# Altium PCB Soldeerbout.PcbDoc
Units mm, origin at the board's own origin, x right, y up, seen from the top; angles counter-clockwise.
Board outline 152.4 x 104.14 mm, 2 copper layers (Top Layer, Bottom Layer); 78 components, 76 nets, 271 pads, 56 vias.
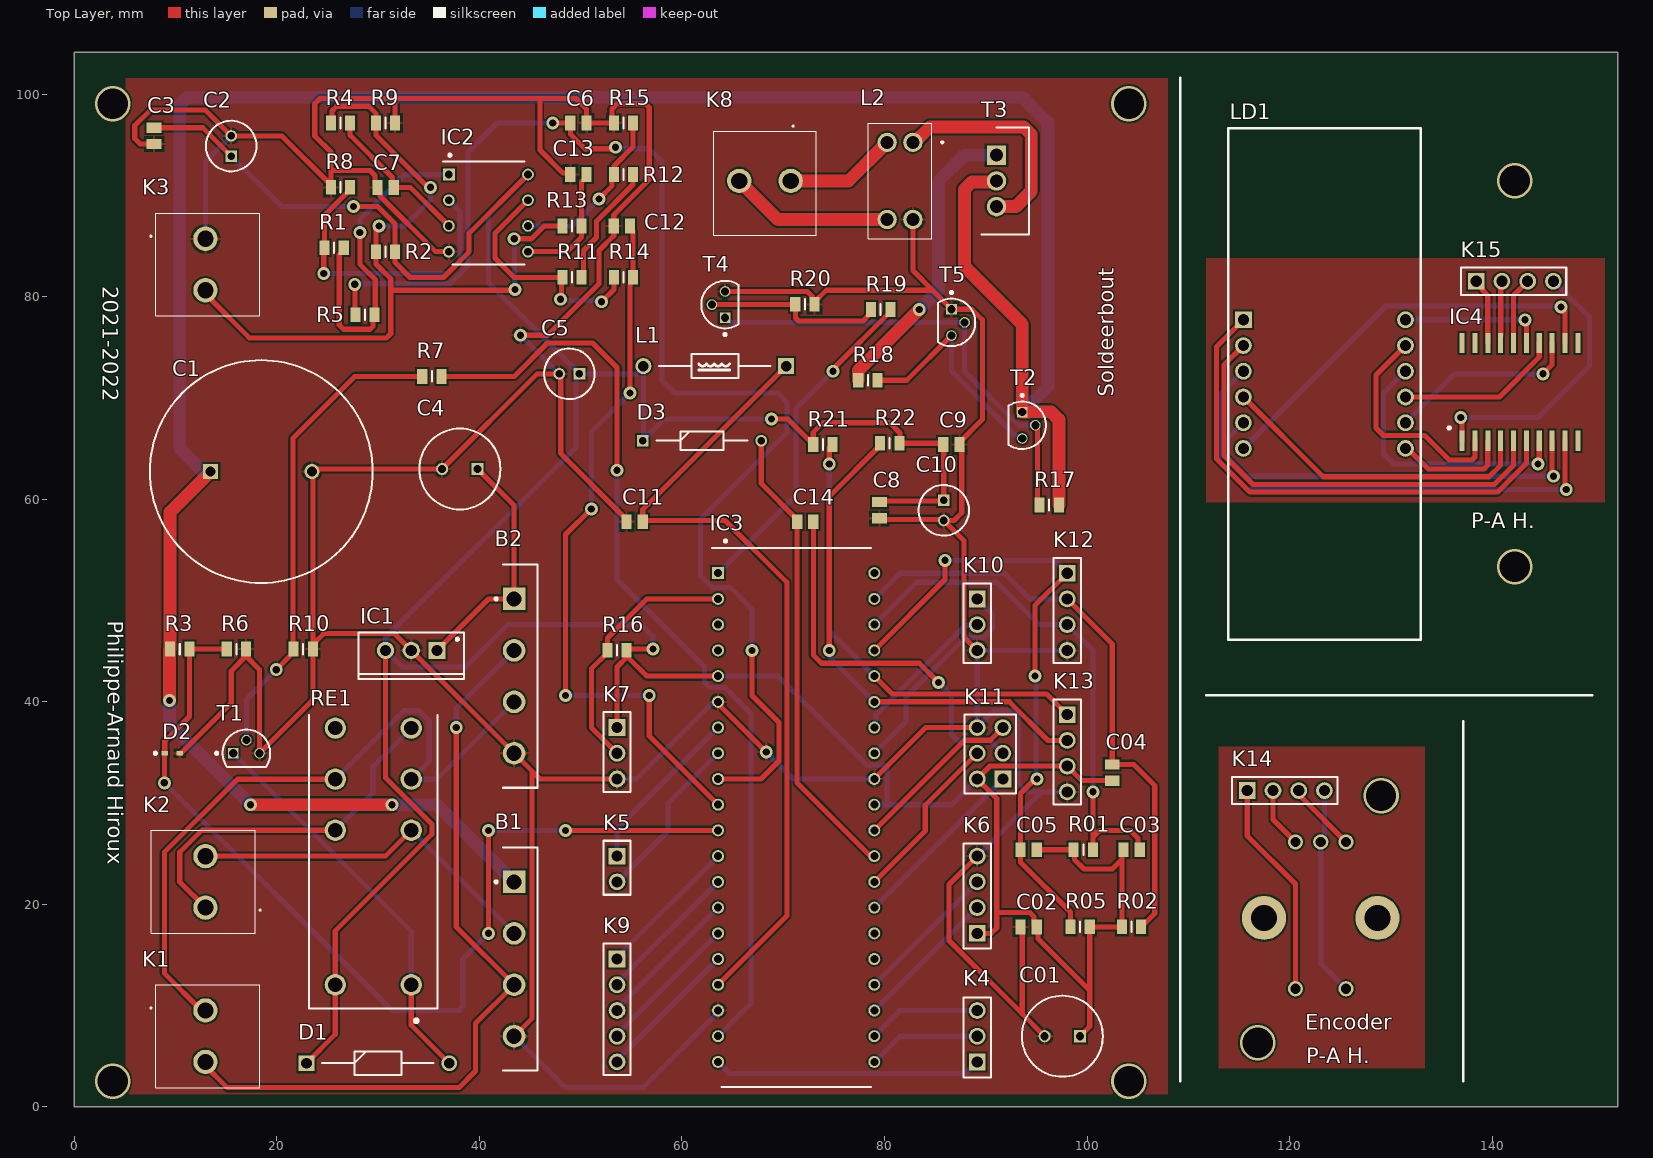
[diagram p0: Top Layer view]
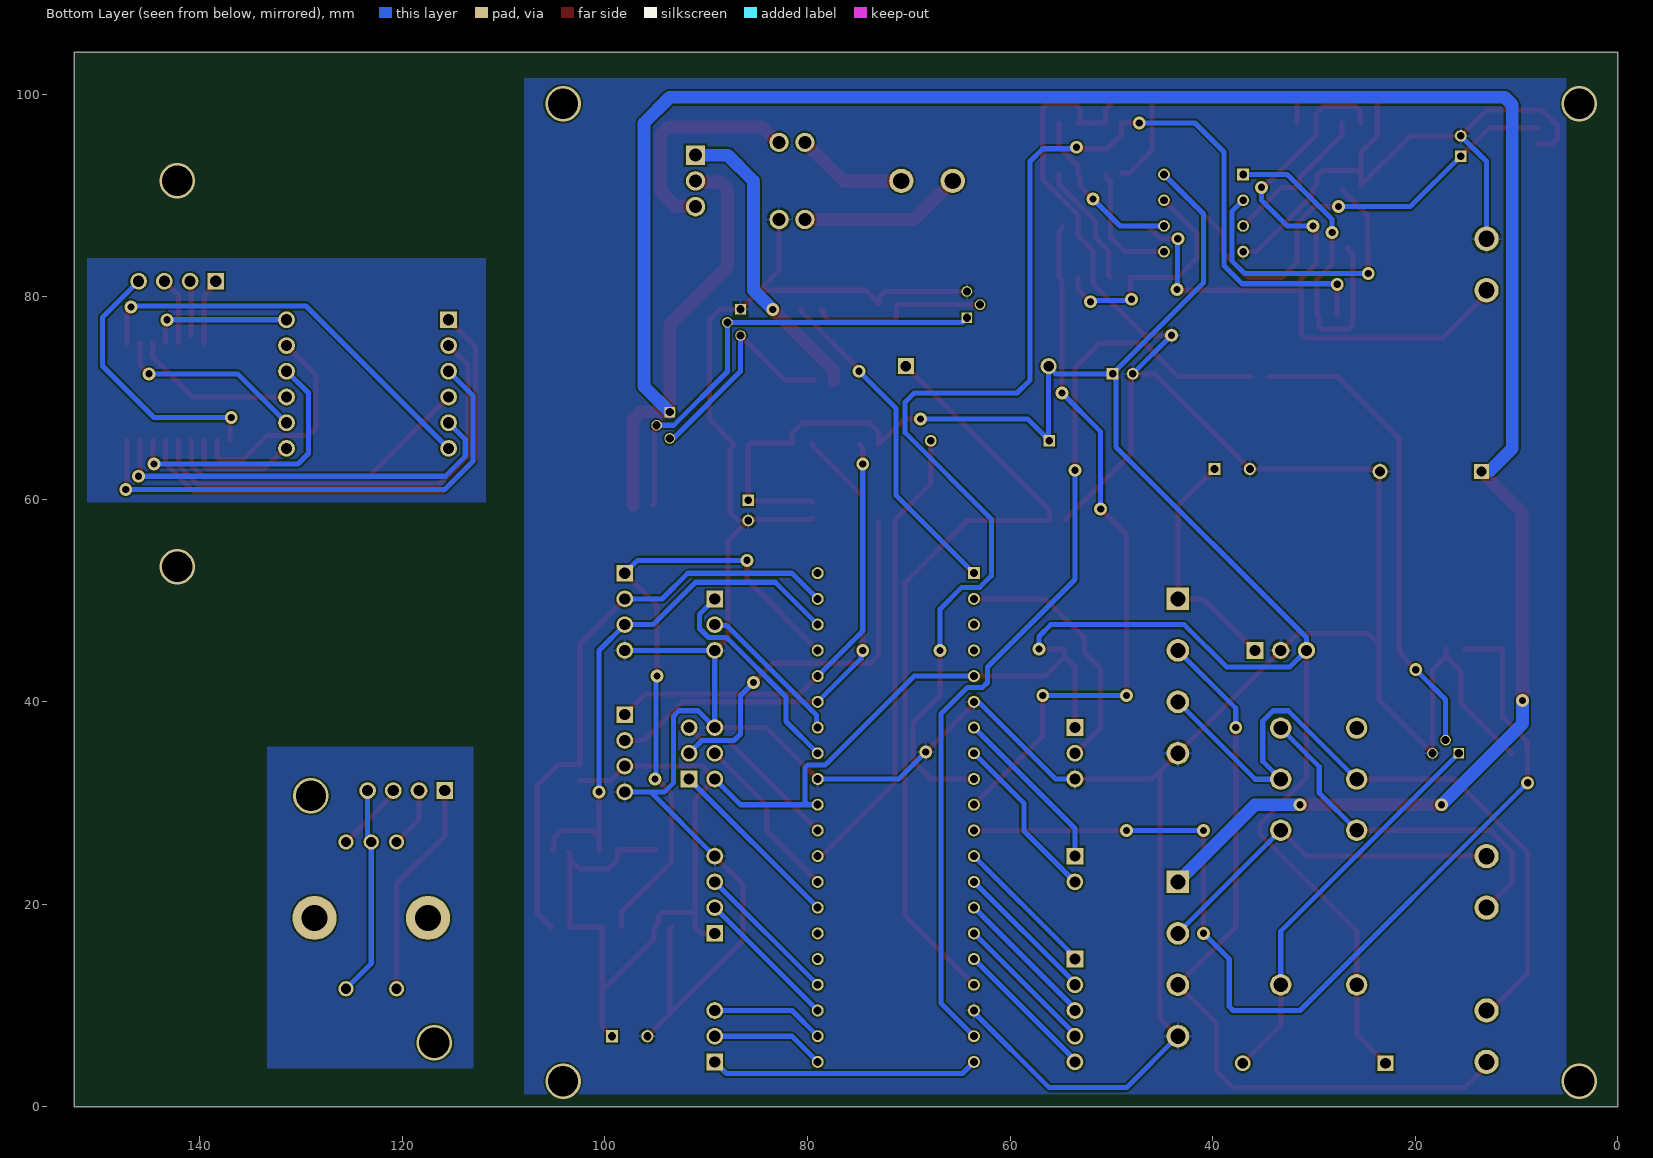
[diagram p1: Bottom Layer view, seen from below]
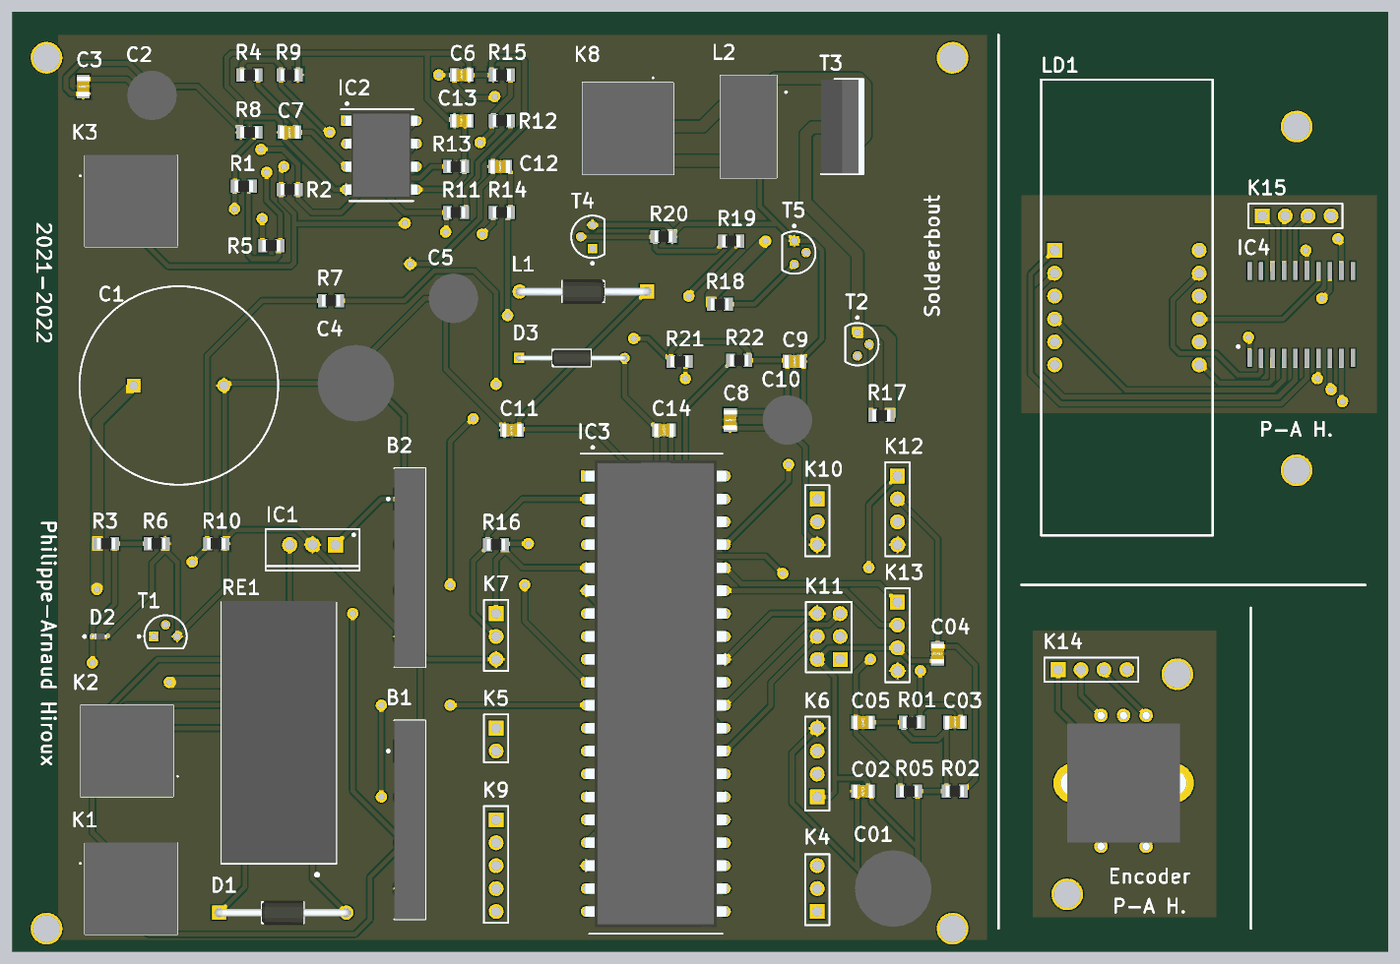
[diagram p2: 3D render of the assembled board from above, using the file's embedded part models]

## Layer stack, top to bottom
Top Solder: solder mask 0.0102, Solder Resist, Dk 3.5
Top Layer: signal copper 0.0356
Dielectric 1: dielectric 0.32, FR-4, Dk 4.8
Bottom Layer: signal copper 0.0356
Bottom Solder: solder mask 0.0102, Solder Resist, Dk 3.5

## Board outline
0,0 152.4,0 152.4,104.14 0,104.14

## Design rules (kind name [scope] priority, off if disabled: settings)
Clearance [All] p1: gap=0.178 ignorepadtopadclearanceinfootprint=FALSE except(0: Arc-Hole Track-Hole SMDPad-Hole THPad-Hole Via-Hole Fill-Hole Poly-Hole Region-Hole Text-Hole; 0.254: Arc-Arc Arc-Track Track-Track)
HoleSize [All] p1: absolutevalues=TRUE maxlimit=3 minlimit=0.025 maxpercent=80.000 minpercent=20.000
PolygonConnect [All] p1: connectstyle=Relief reliefconductorwidth=0.254 reliefentries=4 polygonreliefangle="90 Angle" airgapwidth=0.254
RoutingVias [All] p1: holewidth=0.711 width=1.27 viastyle="Through Hole" minholewidth=0.711 minwidth=1.27 maxholewidth=0.711 maxwidth=1.27
SolderMaskExpansion [All] p1: expansion=0.102 istentingtop=FALSE
Width [All] p1: maxlimit=1.27 minlimit=0.508 preferedwidth=0.508 minimp=50.000000 maximp=50.000000 favimp=50.000000
29 further rules are at their usual default settings.

## Classes and differential pairs
component class Opamps: C2 C3 C6 C7 C12 C13 IC2 K3 R1 R2 R4 R5 R8 R9 R11 R12 R13 R14 R15
component class Omvorming: B1 B2 C4 C5 D1 D2 IC1 K1 K2 R3 R6 R7 R10 RE1 T1
component class mosfet: K8 L2 R17 R18 R19 R20 T2 T3 T4 T5
component class IC3: C8 C9 C10 C11 C14 D3 IC3 K4 K5 K6 K7 K9 K10 K11 L1 R16 R21 R22
component class encoder: Encoder K14
component class display: C01 C02 C03 C04 C05 K12 K13 R01 R02 R05
component class 7-segment: IC4

## Components (designator, comment, footprint, x,y, rotation, side; value= is the part's Value field where it differs from the comment)
B1 "Bruggelijkrichter-600V-6A" Bruggelijkrichter-600V-6A 43.434,22.225 r90 top
B2 "Bruggelijkrichter-600V-6A" Bruggelijkrichter-600V-6A 43.434,50.165 r90 top
C1 "C-4700µF-th" C-4700µF-th 18.462,62.738 r0 top
C01 "C-100µF-th" C-100µF-th 99.314,6.985 r180 top
C2 "C-10µF-th" C-10µF-th 15.494,93.885 r90 top
C02 "100n" C-0805-smd 94.234,17.78 r0 top
C3 "100n" C-0805-smd 7.874,95.885 r90 top
C03 "10n" C-0805-smd 104.394,25.4 r180 top
C4 "C-100µF-th" C-100µF-th 39.822,62.992 r180 top
C04 "10n" C-0805-smd 102.489,33.02 r270 top
C5 "C-10µF-th" C-10µF-th 49.879,72.39 r180 top
C05 "10n" C-0805-smd 94.234,25.4 r0 top
C6 "10n" C-0805-smd 49.784,97.155 r180 top
C7 "10n" C-0805-smd 30.734,90.805 r0 top
C8 "100n" C-0805-smd 79.502,58.928 r90 top
C9 "100n" C-0805-smd 86.614,65.405 r180 top
C10 "C-10µF-th" C-10µF-th 85.852,59.912 r270 top
C11 "100n" C-0805-smd 55.334,57.785 r0 top
C12 "10n" C-0805-smd 54.064,86.995 r0 top
C13 "10n" C-0805-smd 49.784,92.075 r0 top
C14 "100n" C-0805-smd 72.174,57.785 r180 top
D1 "1N4007" 1N4007 29.972,4.318 r0 top
D2 "zenerdiode-5,1V-0,5W" zenerdiode-5,1V-0,5W 9.664,34.925 r0 top
D3 "1N4148" 1N4148 61.976,65.786 r0 top
Encoder "encoder" encoder 125.575,26.169 r180 top
IC1 "L78S05CV" 5V_Regulator-2A 33.274,45.085 r180 top
IC2 "Dual-opamp-6002" Dual-opamp-6002 40.894,88.265 r0 top
IC3 "8-bit-MCU-ATMEGA4809-PF" 8-bit-MCU-ATMEGA4809-PF 71.279,28.575 r0 top
IC4 "TM1637" TM1637 142.748,70.612 r90 top
K1 "Printkroonsteen" Printkroonsteen 12.954,9.525 r270 top
K2 "Printkroonsteen" Printkroonsteen 12.954,19.685 r90 top
K3 "Printkroonsteen" Printkroonsteen 12.954,85.725 r270 top
K4 "Headers 1x3" "Headers 1x3" 89.154,4.445 r90 top
K5 "Headers 1x2" "Headers 1x2" 53.594,24.765 r270 top
K6 "Headers 1x4" "Headers 1x4" 89.154,17.145 r90 top
K7 "Headers 1x3" "Headers 1x3" 53.594,37.465 r270 top
K8 "Printkroonsteen" Printkroonsteen 70.739,91.44 r180 top
K9 "Headers 1x5" "Headers 1x5" 53.594,14.605 r270 top
K10 "Headers 1x3" "Headers 1x3" 89.154,50.165 r270 top
K11 "Headers 2x6" "Headers 2x6" 91.694,32.385 r90 top
K12 "Headers 1x4" "Headers 1x4" 98.044,52.705 r270 top
K13 "Headers 1x4" "Headers 1x4" 98.044,38.735 r270 top
K14 "Headers 1x4" "Headers 1x4" 115.824,31.242 r0 top
K15 "Headers 1x4" "Headers 1x4" 138.43,81.534 r0 top
L1 "10µ" Smorespoel-10µH-130mA 63.246,73.152 r180 top
L2 "smoorspoel-10A" smoorspoel-10A 82.804,95.25 r180 top
LD1 "4-digit_7-segment" 4-digit_7-segment 123.444,71.374 r270 top
R1 "18K" R-0805 25.654,84.836 r180 top
R01 "10k" R-0805 99.629,25.4 r180 top
R2 "1M" R-0805 30.734,84.455 r0 top
R02 "10k" R-0805 104.394,17.78 r180 top
R3 "68K" R-0805 10.414,45.212 r180 top
R4 "5K6" R-0805 26.289,97.155 r180 top
R5 "5K6" R-0805 28.702,78.232 r0 top
R05 "10k" R-0805 99.314,17.78 r0 top
R6 "10K" R-0805 16.002,45.212 r180 top
R7 "10K" R-0805 35.306,72.136 r180 top
R8 "100" R-0805 26.289,90.805 r0 top
R9 "10M" R-0805 30.734,97.155 r180 top
R10 "4K7" R-0805 22.606,45.212 r180 top
R11 "18K" R-0805 49.149,81.915 r180 top
R12 "18K" R-0805 54.229,92.075 r0 top
R13 "5K6" R-0805 49.149,86.995 r180 top
R14 "5K6" R-0805 54.229,81.915 r0 top
R15 "100" R-0805 54.229,97.155 r0 top
R16 "4K7" R-0805 53.594,45.085 r0 top
R17 "4K7" R-0805 96.266,59.436 r0 top
R18 "100" R-0805 78.359,71.755 r180 top
R19 "10K" R-0805 79.629,78.74 r180 top
R20 "4K7" R-0805 72.136,79.248 r180 top
R21 "4K7" R-0805 73.914,65.405 r180 top
R22 "4K7" R-0805 80.518,65.532 r0 top
RE1 "RT424005F" vermogenrelais-5VDC-8A 29.524,12.065 r90 top
T1 "BC547CG" BC547C 16.994,34.925 r0 top
T2 "BC547CG" BC547C 93.599,67.31 r270 top
T3 "Mosfet-55V-17A-100mOhm" Mosfet-55V-17A-100mOhm 91.059,93.98 r270 top
T4 "BC547CG" BC547C 64.262,79.224 r90 top
T5 "BC557CG" BC557C 86.614,77.47 r270 top

## Footprints (in the part's own frame and the unit in brackets; to place one, negate y for a bottom-side part, rotate by r counter-clockwise, add the part's x,y. Pads: shape width x height; smd on the part's side, far side on the other; paste and mask are expansions set on the pad)
1N4007 [mm]
  rect 1.575x1.575 hole 1.05: 1(-7.05,0)
  round 1.575 hole 1.05: 2(7.05,0)
  silkscreen extent -5.5,-1.18 5.5,1.18, body extent -7.48,-1.36 7.46,1.36, height 2.71
1N4148 [mm]
  rect 1.15x1.15 hole 0.75: 1(-5.85,0)
  round 1.15 hole 0.75: 2(5.85,0)
  silkscreen extent -4.5,-0.92 4.5,0.92, body extent -6.13,-0.92 6.08,0.92, height 1.84
4-digit_7-segment [mm]
  rect 1.65x1.65 hole 1.1: 1(-6.35,-8.001)
  round 1.65 hole 1.1: 2(-3.81,-8.001) 3(-1.27,-8.001) 4(1.27,-8.001) 5(3.81,-8.001) 6(6.35,-8.001) 7(6.35,8.001) 8(3.81,8.001) 9(1.27,8.001) 10(-1.27,8.001) 11(-3.81,8.001) 12(-6.35,8.001)
  silkscreen extent -25.25,-9.5 25.25,9.5
5V_Regulator-2A [mm] "TO, Thru-Hole, Vertical, Heatsink Mounted; 3 In-Line Leads; Pitch 2.54 mm"
  rect 1.7x1.7 hole 1.1: 1(-2.54,0)
  round 1.7 hole 1.1: 2(0,0) 3(2.54,0)
  silkscreen extent -5.2,-1.75 5.2,2.85, body extent -5.25,-1.8 5.25,2.9, height 19.7
8-bit-MCU-ATMEGA4809-PF [mm]
  rect 1.184x1.184 hole 0.784: 1(-7.715,24.13)
  round 1.184 hole 0.784: 2(-7.715,21.59) 3(-7.715,19.05) 4(-7.715,16.51) 5(-7.715,13.97) 6(-7.715,11.43) 7(-7.715,8.89) 8(-7.715,6.35) 9(-7.715,3.81) 10(-7.715,1.27) 11(-7.715,-1.27) 12(-7.715,-3.81) 13(-7.715,-6.35) 14(-7.715,-8.89) 15(-7.715,-11.43) 16(-7.715,-13.97) 17(-7.715,-16.51) 18(-7.715,-19.05) 19(-7.715,-21.59) 20(-7.715,-24.13) 21(7.715,-24.13) 22(7.715,-21.59) 23(7.715,-19.05) 24(7.715,-16.51) 25(7.715,-13.97) 26(7.715,-11.43) 27(7.715,-8.89) 28(7.715,-6.35) 29(7.715,-3.81) 30(7.715,-1.27) 31(7.715,1.27) 32(7.715,3.81) 33(7.715,6.35) 34(7.715,8.89) 35(7.715,11.43) 36(7.715,13.97) 37(7.715,16.51) 38(7.715,19.05) 39(7.715,21.59) 40(7.715,24.13)
  silkscreen extent -8.31,-26.61 7.37,27.43, body extent -7.86,-25.88 7.86,25.88, height 6.35
BC547C [mm] "TO, 3-Leads, Body Dia 4.7mm, Pitch 1.27mm"
  rect 1.05x1.05 hole 0.8: 1(-1.3,0)
  round 1.05 hole 0.8: 2(0,1.3) 3(1.3,0)
  silkscreen extent -3.07,-1.34 2.35,2.35, body extent -2.35,-1.33 2.36,2.36, height 7.87
BC557C [mm] "TO, 3-Leads, Body Dia 4.7mm, Pitch 1.27mm"
  rect 1.05x1.05 hole 0.8: 1(-1.3,0)
  round 1.05 hole 0.8: 2(0,1.3) 3(1.3,0)
  silkscreen extent -3.07,-1.34 2.35,2.35, body extent -2.35,-1.33 2.36,2.36, height 7.87
Bruggelijkrichter-600V-6A [mm]
  rect 2.235x2.235 hole 1.49: 1(0,0)
  round 2.235 hole 1.49: 2(-5.08,0) 3(-10.16,0) 4(-15.24,0)
  silkscreen extent -18.64,-2.32 3.4,1.9, body extent -18.65,-2.32 3.4,1.11, height 18.9
C-10µF-th [mm]
  rect 1.15x1.15 hole 0.75: 1(0,0)
  round 1.15 hole 0.75: 2(2,0)
  silkscreen extent -1.5,-2.5 3.5,2.5, body extent -1.75,-2.75 3.75,2.75, height 12
C-100µF-th [mm]
  rect 1.2x1.2 hole 0.8: 1(0,0)
  round 1.2 hole 0.8: 2(3.5,0)
  silkscreen extent -2.25,-4 5.75,4, body extent -2.5,-4.25 6,4.25, height 12.5
C-0805-smd [mm]
  rect 1.02x1.47 smd: 1(-0.8,0) 2(0.8,0)
  body extent -1.1,-0.73 1.1,0.72, height 0.88
C-4700µF-th [mm]
  rect 1.5x1.5 hole 1: 1(-5,0)
  round 1.5 hole 1: 2(5,0)
  silkscreen extent -11,-11 11,11
Dual-opamp-6002 [mm]
  rect 1.158x1.158 hole 0.758: 1(-3.905,3.81)
  round 1.158 hole 0.758: 2(-3.905,1.27) 3(-3.905,-1.27) 4(-3.905,-3.81) 5(3.905,-3.81) 6(3.905,-1.27) 7(3.905,1.27) 8(3.905,3.81)
  silkscreen extent -4.48,-5.08 3.56,5.84, body extent -4.04,-4.75 4.04,4.75, height 5.33
encoder [mm]
  round 1.5 hole 1: A1(0,0) B1(5,0) C1(2.5,0) MH1(0,14.5) MH2(5,14.5)
  round 4.35 hole 2.54: MH3(-3.1,7.5) MH4(8.1,7.5)
  body extent -4.44,-0.4 9.45,14.9, height 17.6
"Headers 1x2" [mm]
  rect 1.65x1.65 hole 1.1: 1(0,0)
  round 1.65 hole 1.1: 2(2.54,0)
  silkscreen extent -1.52,-1.35 3.81,1.35
"Headers 1x3" [mm]
  rect 1.65x1.65 hole 1.1: 1(0,0)
  round 1.65 hole 1.1: 2(2.54,0) 3(5.08,0)
  silkscreen extent -1.52,-1.35 6.35,1.35
"Headers 1x4" [mm]
  rect 1.65x1.65 hole 1.1: 1(0,0)
  round 1.65 hole 1.1: 2(2.54,0) 3(5.08,0) 4(7.62,0)
  silkscreen extent -1.52,-1.35 8.89,1.35
"Headers 1x5" [mm]
  rect 1.65x1.65 hole 1.1: 1(0,0)
  round 1.65 hole 1.1: 2(2.54,0) 3(5.08,0) 4(7.62,0) 5(10.16,0)
  silkscreen extent -1.52,-1.35 11.43,1.35
"Headers 2x6" [mm]
  rect 1.65x1.65 hole 1.1: 1(0,0)
  round 1.65 hole 1.1: 2(0,2.54) 3(2.54,0) 4(2.54,2.54) 5(5.08,0) 6(5.08,2.54)
  silkscreen extent -1.45,-1.27 6.35,3.81
Mosfet-55V-17A-100mOhm [mm]
  rect 1.92x1.92 hole 1.28: 1(0,0)
  round 1.92 hole 1.28: 2(2.54,0) 3(5.08,0)
  silkscreen extent -2.73,-1.5 7.81,3.19, body extent -2.67,-1.5 7.75,3.19, height 18.84
Printkroonsteen [mm]
  round 2.4 hole 1.6: 1(0,0) 2(5.08,0)
  silkscreen extent -2.54,-5.45 7.62,5.35, body extent -2.54,-4.9 7.62,5.35, height 14.1
R-0805 [mm]
  rect 1x1.45 smd: 1(-0.95,0) 2(0.95,0)
  silkscreen extent 0,-0.53 0,0.53, body extent -1,-0.63 1,0.63, height 0.55
smoorspoel-10A [mm]
  round 1.905 hole 1.27: 1(0,0) 2(2.54,0) 3(2.54,7.62) 4(0,7.62)
  silkscreen extent -3,-1.88 4.42,9.5, body extent -1.88,-1.88 4.42,9.5, height 9.6
Smorespoel-10µH-130mA [mm]
  rect 1.575x1.575 hole 1.05: 1(-7.05,0)
  round 1.575 hole 1.05: 2(7.05,0)
  silkscreen extent -5.5,-1.18 5.5,1.18, body extent -7.48,-1.36 7.46,1.36, height 2.71
TM1637 [mm]
  rect 2x0.5 smd: 1(-4.818,5.715) 2(-4.818,4.445) 3(-4.818,3.175) 4(-4.818,1.905) 5(-4.818,0.635) 6(-4.818,-0.635) 7(-4.818,-1.905) 8(-4.818,-3.175) 9(-4.818,-4.445) 10(-4.818,-5.715) 11(4.818,-5.715) 12(4.818,-4.445) 13(4.818,-3.175) 14(4.818,-1.905) 15(4.818,-0.635) 16(4.818,0.635) 17(4.818,1.905) 18(4.818,3.175) 19(4.818,4.445) 20(4.818,5.715)
  silkscreen extent -3.69,6.86 -3.44,7.11
vermogenrelais-5VDC-8A [mm]
  round 2.1 hole 1.4: 11(20.3,3.75) 12(15.26,3.75) 14(25.34,3.75) 21(20.3,-3.75) 22(15.26,-3.75) 24(25.34,-3.75) A1(0,3.75) A2(0,-3.75)
  silkscreen extent -3.67,-6.35 26.65,6.35, body extent -2.21,-6.35 26.79,6.35, height 15.86
zenerdiode-5,1V-0,5W [mm]
  rect 0.64x0.42 smd: 1(-0.75,0) 2(0.75,0)
  silkscreen extent -1.78,-0.13 -1.52,0.13, body extent -0.8,-0.4 0.8,0.4, height 0.7

## Part data
B1 B2: "Bridge Rectifier", Manufacturer_Name=Vishay, Manufacturer_Part_Number=GBU6J-E3/45, Datasheet Link=http://www.vishay.com/docs/88615/gbu6a.pdf, Height=18.8mm
C1: "Capacitor Polarised", Manufacturer_Name=Kemet, Manufacturer_Part_Number=ESK478M050AQ3AA, Mouser2 Part Number=80-ESK478M050AQ3AA, Datasheet Link=https://componentsearchengine.com//ESK478M050AQ3AA.pdf, Height=37mm, Mouser2 Price/Stock=https://www.mouser.com/Search/Refine.aspx?Keyword=80-ESK478M050AQ3AA
C01 C4: "Capacitor Polarised", Manufacturer_Name=Kemet, Manufacturer_Part_Number=ESK107M050AG3EA, Height=12.5mm
C2 C5 C10: "Capacitor Polarised", Manufacturer_Name=Panasonic, Manufacturer_Part_Number=ECA-1HM100I, Mouser2 Part Number=667-ECA-1HM100I, Datasheet Link=https://componentsearchengine.com//ECA-1HM100I.pdf, Height=12mm, Mouser2 Price/Stock=https://www.mouser.com/Search/Refine.aspx?Keyword=667-ECA-1HM100I
C02 C3 C03 C04 C05 C6 C7 C8 C9 C11 C12 C13 C14: library part C-0805-smd, "Capacitor", Manufacturer_Name=Kemet, Manufacturer_Part_Number=C0805C301G5GACTU, Datasheet Link=https://connect.kemet.com:7667/gateway/IntelliData-ComponentDocumentation/1.0/download/specsheet/C0805C301G5GACTU, Height=0.88mm
D1: "Diode", Manufacturer_Name=Rectron, Manufacturer_Part_Number=1N4007-T, Mouser2 Part Number=583-1N4007-T, Datasheet Link=https://componentsearchengine.com//1N4007-T.pdf, Mouser2 Price/Stock=https://www.mouser.com/Search/Refine.aspx?Keyword=583-1N4007-T
D2: "Zener Diode", Manufacturer_Name="ON Semiconductor", Manufacturer_Part_Number=MM5Z4689T1G, Datasheet Link=https://www.mouser.in/datasheet/2/308/1/MM5Z4678T1_D-2315920.pdf, Height=0.7mm
D3: "Diode", Manufacturer_Name=Nexperia, Datasheet Link=https://datasheet.datasheetarchive.com/originals/distributors/Datasheets-112/DSAP0040891.pdf, Manufacturer_Part_Number=1N4148
Encoder: "Undefined or Miscellaneous", Manufacturer_Name="Alpha (Taiwan)", Manufacturer_Part_Number=RE130F-41-175F-12P, Mouser2 Part Number=318-ENC130175F-12PS, Datasheet Link=https://componentsearchengine.com//RE130F-41-175F-12P.pdf, Height=17.5mm, Mouser2 Price/Stock=https://www.mouser.com/Search/Refine.aspx?Keyword=318-ENC130175F-12PS
IC1: library part 5V_Regulator-2A, "2A Positive Voltage Regulator, 5V, 3-Pin TO-220", ComponentLink1Description="Manufacturer URL", ComponentLink1URL=http://www.st.com, ComponentLink2Description=Datasheet, ComponentLink2URL=http://www.st.com/internet/com/TECHNICAL_RESOURCES/TECHNICAL_LITERATURE/DATASHEET/CD00000449.pdf, ComponentLink3Description="Package Specification", ComponentLink3URL=http://www.st.com/internet/com/TECHNICAL_RESOURCES/TECHNICAL_LITERATURE/PACKAGE_INFORMATION/CD00004649.pdf, DatasheetVersion=1/03/2010, PackageDescription="TO, Thru-Hole, Vertical, Heatsink Mounted; 3 In-Line Leads; Pitch 2.54 mm", PackageReference=TO220, PackageVersion=ver3.0
IC2: "Integrated Circuit", Manufacturer_Name=Microchip, Manufacturer_Part_Number=MCP6002-E/P, Mouser2 Part Number=579-MCP6002-E/P, Datasheet Link=https://componentsearchengine.com//MCP6002-E_P.pdf, Height=5.334mm, Mouser2 Price/Stock=https://www.mouser.com/Search/Refine.aspx?Keyword=579-MCP6002-E%2FP
IC3: "Integrated Circuit", Manufacturer_Name=Microchip, Manufacturer_Part_Number=ATMEGA4809-PF, Mouser2 Part Number=556-ATMEGA4809-PF, Datasheet Link=https://componentsearchengine.com//ATMEGA4809-PF.pdf, Height=6.35mm, Mouser2 Price/Stock=https://www.mouser.com/Search/Refine.aspx?Keyword=556-ATMEGA4809-PF
IC4: "Led Drive Control Special Circuit"
K1 K2 K3 K8: "Connector", Manufacturer_Name="CUI Inc.", Manufacturer_Part_Number=TB007-508-02BE, Mouser2 Part Number=490-TB007-508-02BE, Datasheet Link=https://componentsearchengine.com//TB007-508-02BE.pdf, Height=14mm, Mouser2 Price/Stock=https://www.mouser.com/Search/Refine.aspx?Keyword=490-TB007-508-02BE
K4 K5 K6 K7 K9 K10 K12 K13 K14 K15: "Connector", Manufacturer_Name="TE Connectivity", Manufacturer_Part_Number=2-826646-0, Datasheet Link=https://componentsearchengine.com/Datasheets/1/2-826646-0.pdf, Height=8.8mm
K11: "Connector", Manufacturer_Name=Harwin, Manufacturer_Part_Number=M20-9761042, Mouser2 Part Number=855-M20-9761042, Datasheet Link=https://componentsearchengine.com//M20-9761042.pdf, Height=8.38mm, Mouser2 Price/Stock=https://www.mouser.com/Search/Refine.aspx?Keyword=855-M20-9761042
L1: library part Smorespoel-10µH-130mA, "THT Common Mode Power Line Choke WE-CMB, L = 1.00 mH", Inductance="1.00 mH", ComponentLink1Description="Manufacturer Link", ComponentLink1URL=http://www.we-online.com, ComponentLink2Description=Datasheet, ComponentLink2URL=http://www.we-online.de/katalog/media/pdf/744824101.pdf, DatasheetVersion="ver 5, Oct-2004", PackageDescription="THT Inductor, 4-Leads, Body 27.5 x 18.5 mm", PackageReference=WE-CMB-L, PackageVersion=2004
L2: "Transformer", Manufacturer_Name="Laird Technologies", Manufacturer_Part_Number=CM2545X171B-10, Datasheet Link=https://datasheet.datasheetarchive.com/originals/dk/DKDS-7/122753.pdf, Height=9.5mm
R1 R01 R2 R02 R3 R4 R5 R05 R6 R7 R8 R9 R10 R11 R12 R13 R14 R15 R16 R17 R18 R19 R20 R21 R22: library part R-0805, "Resistor", Manufacturer_Name=Vishay, Manufacturer_Part_Number=TNPU0805500RAZEN00, Height=0.55mm
RE1: library part vermogenrelais-5VDC-8A, "RELAY GENERAL PURPOSE DPDT 8A 5V", Coil Current=80.6mA, Coil Power=500mW, Coil Resistance=62R, Coil Voltage (DC)=5V, Contact Current Rating=8A, Contact Voltage Rating (AC)=250V, Dropout Voltage=500mV, Max Operating Temperature=85°C, Max Voltage Rating (AC)=400V, Min Operating Temperature=-40°C, Package Quantity=5000, Power Consumption=400mW, Coil Type=Non-Latching, Contact Material=Silver, ELV=Compliant, Height=15.7mm, Lead Free="Lead Free", Length=29mm, Mount="Through Hole", Operate Time=7ms, Packaging=Carton, Radiation Hardening=No, Relay Type="General Purpose", Release Time=3ms, RoHS Compliant=Yes, Series=RT2, Termination=PCB, Throw Configuration=DPDT, Weight=13g, Width=12.7mm
T1 T2 T4: library part BC547C, "Amplifier Transistor, NPN Silicon, 3-Pin TO-92, Pb-Free, Bulk Box", Manufacturer="On Semiconductor", ComponentLink1Description="Manufacturer URL", ComponentLink1URL=http://www.onsemi.com/, ComponentLink2Description=Datasheet, ComponentLink2URL=http://www.onsemi.com/pub_link/Collateral/BC546-D.PDF, ComponentLink3Description="Package Specification", ComponentLink3URL=http://www.onsemi.cn/pub_link/Collateral/2N6426-D.PDF, DatasheetVersion="Rev. 7", fT Min (MHz)=150, IC Continuous (A)=0.1, Mounting Technology="Through Hole", PackageDescription="3-Pin Transistor Outline, Body 4.825 x 3.685 mm, Pitch 1.27 mm", PackageReference=TO-92-3-29-11_AM_SL, PackageVersion="Rev. AM", Packing="Bulk Box", PartNumber=BC547CG, Polarity=NPN, RoHS=TRUE
T3: "MOSFET (P-Channel)", Manufacturer_Name=Infineon, Manufacturer_Part_Number=IRF9Z34NPBF, Mouser2 Part Number=942-IRF9Z34NPBF, Datasheet Link=https://componentsearchengine.com//IRF9Z34NPBF.pdf, Height=4.69mm, Mouser2 Price/Stock=https://www.mouser.com/Search/Refine.aspx?Keyword=942-IRF9Z34NPBF
T5: library part BC557C, "Amplifier Transistor, PNP Silicon, 3-Pin TO-92, Pb-Free, Bulk Box", Manufacturer="On Semiconductor", ComponentLink1Description="Manufacturer URL", ComponentLink1URL=http://www.onsemi.com/, ComponentLink2Description=Datasheet, ComponentLink2URL=http://www.onsemi.com/pub_link/Collateral/BC556B-D.PDF, ComponentLink3Description="Package Specification", ComponentLink3URL=http://www.onsemi.cn/pub_link/Collateral/2N6426-D.PDF, DatasheetVersion="Rev. 3", IC Continuous (A)=-0.1, Mounting Technology="Through Hole", PackageDescription="3-Pin Transistor Outline, Body 4.825 x 3.685 mm, Pitch 1.27 mm", PackageReference=TO-92-3-29-11_AM_SL, PackageVersion="Rev. AM", Packing="Bulk Box", PartNumber=BC557CG, Polarity=PNP, RoHS=TRUE

## Via types
v1: diameter 1.27, hole 0.711, Top Layer to Bottom Layer, 48 vias
v2: diameter 3.508, hole 3, Top Layer to Bottom Layer, 8 vias

## Nets (pads, with @x,y where several pads share a name; then routed paths per layer and width w, separated by ;. In a path a pad name is that pad's centre, name@x,y a point inside that pad or via, vN(x,y) a via of type N, cw(c..) or ccw(c..) an arc to the next point about the centre after c; other vN are vias at no path point)
+5: C01.1 C2.1 C02.2 C03.2 C3.2 C04.2 C5.1 C05.2 C8.2 C9.2 C10.1 D1.1 D3.1 IC1.3 IC2.8 IC3.5 IC3.31 K6.1 K7.1 K11.2 K13.3 L1.2 R01.2 R02.2 R2.2 R05.2 R16.2 R21.2 R22.2 RE1.A1 | length 382.4
  Top Layer w0.508: C3.2 12.694,96.685 C2.1 ; D1.1 25.774,7.17 RE1.A1 25.774,17.392 35.306,26.924 35.306,27.94 30.734,32.512 IC1.3 ; v1(27.559,88.9) 29.972,88.9 31.684,87.188 R2.2 31.684,83.378 33.147,81.915 36.449,81.915 38.989,84.455 38.989,86.265 IC2.8@44.739,92.015 ; K7.1 53.594,43.434 R16.2@54.61,44.45 ; R16.2 54.61,45.019 R16.2@54.61,44.45 ; R16.2@54.671,45.212 v1(57.15,45.212) ; IC3.5 56.515,42.545 R16.2@54.61,44.45 ; v1(68.834,67.945) 70.424,67.945 72.493,65.876 72.718,65.876 72.739,65.855 R21.2@72.739,65.63 ; R21.2 72.964,66.614 73.914,67.564 80.518,67.564 81.534,66.548 R22.2@81.534,65.598 ; C8.2 79.594,59.82 85.76,59.82 C10.1 85.852,65.367 85.687,65.532 R22.2 ; K6.1 90.551,17.145 91.081,17.675 91.081,19.199 ; C05.2 R01.2 ; R01.2@98.747,25.332 98.747,24.443 99.695,23.495 102.489,23.495 103.444,24.45 ; C01.1 100.264,7.935 100.264,11.496 ; C04.2 99.479,32.22 K13.3 90.424,33.655 K11.2 91.081,30.458 91.081,19.199 ; C03.2@103.594,25.175 103.444,25.025 103.444,24.45 ; 91.081,19.199 94.339,19.199 94.778,18.76 94.778,18.036 95.16,17.654 95.16,16.6 100.264,11.496 ; 100.264,11.496 R05.2 R02.2 103.444,24.45
  Bottom Layer w0.508: C2.1 20.479,88.9 v1(27.559,88.9) ; IC2.8 40.894,88.17 40.894,81.375 C5.1 ; L1.2@56.134,73.025 55.499,72.39 C5.1 ; L1.2 56.196,65.856 D3.1@56.574,66.234 ; D3.1@56.574,66.242 58.277,67.945 v1(68.834,67.945) ; v1(57.15,45.212) 57.15,46.46 55.985,47.625 42.799,47.625 38.608,43.434 32.385,43.434 IC1.3 30.734,46.355 49.53,65.151 49.53,71.771 49.558,71.799 49.558,72.069 C5.1 ; IC3.5 69.469,42.545 78.232,33.782 79.966,33.782 80.264,33.484 80.264,30.178 79.931,29.845 ; IC3.31 79.931,29.845 ; K11.2 86.614,29.845 79.931,29.845
GND: B1.4 B2.4 C1.2 C01.2 C02.1 C2.2 C3.1 C4.2 C5.2 C6.1 C7.1 C8.1 C9.1 C10.2 C11.1 C12.1 C13.1 D2.2 IC1.2 IC2.4 IC3.6 IC3.18 IC3.32 K3.1 K6.4 K7.3 K10.3 K11.6 K12.4 K13.4 L2.4 R6.1 R8.1 R9.1 R10.1 R15.1 R20.1 T1.3 T4.3 T5.1 | length 528.2
  Top Layer w0.508: C3.1 6.515,95.085 5.969,95.631 5.969,96.901 7.493,98.425 12.954,98.425 C2.2 20.484,95.885 25.339,91.03 25.339,92.456 ; D2.2 10.524,34.925 15.494,39.895 15.494,43.058 R6.1@16.952,44.516 ; R6.1 R6.1@16.952,44.516 ; C1.2 23.556,62.644 R10.1 23.556,40.187 T1.3 18.294,43.174 R6.1@16.952,44.516 ; C1.2@23.462,62.992 C4.2 45.72,72.39 C5.2 ; R10.1@23.802,45.9 24.638,46.736 31.623,46.736 IC1.2 B2.4 45.212,33.147 ; C7.1@29.701,91.038 29.701,91.965 29.21,92.456 25.339,92.456 ; C7.1 30.19,90.549 30.19,89.952 35.687,84.455 IC2.4 ; R9.1 31.684,99.126 31.242,99.568 ; B1.4 45.212,8.763 45.212,33.147 ; v1(44.069,76.2) 46.736,76.2 51.816,81.28 51.816,84.582 53.262,86.028 C12.1@53.262,86.993 ; C5.2@48.028,72.241 48.028,64.516 C11.1@54.534,58.01 ; C13.1@48.984,92.22 48.242,92.22 45.974,94.488 45.974,99.568 ; R15.1@53.086,97.348 53.086,98.552 53.594,99.06 56.388,99.06 56.769,98.679 56.769,91.567 53.264,88.062 C12.1 ; R15.1 C6.1 50.584,98.514 49.53,99.568 45.974,99.568 ; K7.3 45.974,32.385 45.212,33.147 ; IC3.6@63.564,39.814 v1(68.326,35.052) ; T4.3 72.384,80.524 72.898,80.01 72.898,79.436 R20.1 73.086,79.473 74.258,80.645 84.739,80.645 ; IC3.32 84.074,37.465 K11.6 ; C8.1 79.61,58.02 85.744,58.02 C10.2 ; L2.4 82.804,82.58 84.739,80.645 ; C9.1@87.302,65.293 87.63,64.964 87.63,58.674 86.868,57.912 C10.2 ; C9.1@87.302,65.517 89.662,67.878 89.662,77.724 88.616,78.77 T5.1 84.739,80.645 ; K6.4 86.36,21.971 86.36,16.439 93.599,9.2 ; K10.3 87.836,46.403 87.836,55.928 C10.2 ; C02.1 93.599,17.615 93.599,9.2 ; C01.2 93.599,9.2 ; 25.339,92.456 25.339,94.295 23.749,95.885 23.749,99.06 24.257,99.568 31.242,99.568 ; 31.242,99.568 45.974,99.568
  Bottom Layer w0.508: K3.1 12.954,93.345 C2.2 ; B1.4 48.514,1.905 56.134,1.905 63.564,9.335 IC3.18 ; v1(44.069,76.2) C5.2 ; K7.3 55.499,32.385 62.99,39.876 63.435,39.876 IC3.6 ; v1(68.326,35.052) 70.993,32.385 IC3.32 ; K6.4 95.504,31.115 ; K13.4 95.504,31.115 ; K12.4 K10.3 K11.6 90.805,39.116 92.71,39.116 93.218,38.608 93.218,32.004 94.107,31.115 95.504,31.115
NetB1_2: B1.2 K2.2 RE1.22 | length 35.7
  Top Layer w0.508: K2.2 30.714,24.765 RE1.22
  Bottom Layer w0.508: RE1.22@33.274,27.315 B1.2@43.434,17.155
NetB1_3: B1.3 B2.2 K1.2 | length 76.4
  Top Layer w0.508: K1.2@12.763,4.255 15.113,1.905 37.973,1.905 39.624,3.556 39.624,8.255 B1.3 37.719,17.78 v1(37.719,37.465)
  Bottom Layer w0.508: v1(37.719,37.465) 37.719,39.37 B2.2
NetB2_1: B2.1 C4.1 IC1.1 | length 24
  Top Layer w0.508: IC1.1 40.894,50.165 B2.1 43.434,59.38 C4.1
NetB2_3: B2.3 K1.1 RE1.11 RE1.21 | length 69.7
  Top Layer w0.508: K1.1 12.573,9.525 8.89,13.208 8.89,25.146 16.109,32.365 RE1.11
  Bottom Layer w0.508: RE1.11 32.525,39.116 34.036,39.116 35.052,38.1 35.052,34.143 RE1.21 35.794,32.365 B2.3
NetC03_1: C03.1 IC3.38 K12.3 R01.1 | length 52
  Top Layer w0.508: R01.1 100.579,26.665 ; v1@100.579,31.115 100.579,26.665 ; C03.1 105.03,25.564 105.03,26.542 104.267,27.305 101.219,27.305 100.579,26.665
  Bottom Layer w0.508: IC3.38 83.185,51.816 91.059,51.816 95.25,47.625 K12.3 100.584,45.085 v1(100.584,31.115) v1@100.584,31.11
NetC04_1: C04.1 IC3.39 K12.2 R02.1 | length 58.9
  Top Layer w0.508: K12.2 102.489,45.72 C04.1 104.61,33.82 106.68,31.75 106.68,19.116 R02.1
  Bottom Layer w0.508: IC3.39 81.534,52.705 91.821,52.705 94.361,50.165 K12.2
NetC05_1: C05.1 IC3.37 K12.1 R05.1 | length 63.5
  Top Layer w0.508: IC3.37 85.979,52.07 v1(85.979,53.975) ; v1(94.869,42.545) 94.869,49.53 K12.1 ; v1(95.047,32.385) 94.869,32.385 93.434,30.95 C05.1 93.434,24.168 98.364,19.238 R05.1
  Bottom Layer w0.508: v1(85.979,53.975) 96.774,53.975 K12.1 ; v1(94.869,42.545) 94.958,42.456 94.958,32.474 v1(95.047,32.385)
NetC6_2: C6.2 IC3.9 R5.1 | length 133.2
  Top Layer w0.508: R5.1@27.686,78.298 27.719,78.331 27.719,81.196 v1(27.686,81.229) ; v1(47.244,97.155) C6.2 48.984,96.05 50.419,94.615 v1@53.3,94.615 ; IC3.9 67.818,32.385 69.596,34.163 69.596,37.973 66.929,40.64 v1(66.929,45.085)
  Bottom Layer w0.508: v1(27.686,81.229) 27.737,81.28 37.084,81.28 38.862,83.058 38.862,94.282 41.735,97.155 v1(47.244,97.155) ; v1@53.595,94.616 54.125,94.616 54.126,94.615 56.769,94.615 58.039,93.345 58.039,71.755 59.309,70.485 69.469,70.485 70.358,69.596 70.358,66.577 61.849,58.068 61.849,52.451 62.992,51.308 64.77,51.308 66.929,49.149 v1(66.929,45.085)
  other v1: 53.447,94.762
NetC7_2: C7.2 IC2.3 R4.1 | length 15
  Top Layer w0.508: R4.1 27.239,95.951 31.418,91.772 C7.2@31.418,90.921 ; C7.2 33.179,90.805 IC2.3
NetC11_2: C11.2 IC3.17 L1.1 | length 80.3
  Top Layer w0.508: C11.2@56.134,57.912 56.134,58.99 L1.1 ; C11.2@56.261,57.912 64.262,57.912 70.358,51.816 70.358,18.859 IC3.17
NetC12_2: C12.2 IC3.10 R14.2 | length 71.1
  Top Layer w0.508: v1(48.514,40.64) 48.514,56.515 v1(51.054,59.055) ; v1(54.864,70.485) 54.864,81.146 54.933,81.215 54.933,81.669 R14.2 55.179,86.455 54.864,86.77 C12.2 ; v1(56.769,40.64) 56.769,36.64 IC3.10
  Bottom Layer w0.508: v1(48.514,40.64) v1(56.769,40.64) ; v1(51.054,59.055) 51.054,66.675 v1(54.864,70.485)
NetC13_2: C13.2 IC2.5 R13.1 | length 12.3
  Top Layer w0.508: IC2.5 48.641,84.455 50.099,85.913 R13.1 50.099,91.365 50.584,91.85 C13.2
NetC14_1: C14.1 K11.3 | length 38.1
  Top Layer w0.508: C14.1 72.974,44.628 73.787,43.815 83.439,43.815 v1(85.344,41.91)
  Bottom Layer w0.508: v1(85.344,41.91) 86.614,40.64 86.614,36.83 87.249,36.195 90.424,36.195 K11.3
NetC14_2: C14.2 D3.2 IC3.29 | length 45.9
  Top Layer w0.508: D3.2 67.826,61.558 71.374,58.01 C14.2 71.374,32.004 78.484,24.894 78.865,24.894 IC3.29
NetD1_2: D1.2 RE1.A2 T1.1 | length 39.4
  Top Layer w0.508: RE1.A2 33.274,8.066 D1.2
  Bottom Layer w0.508: T1.1 33.274,17.345 RE1.A2
NetD2_1: D2.1 IC3.11 R3.1 R6.2 | length 97.9
  Top Layer w0.508: v1@8.914,32.028 D2.1 ; D2.1@8.926,34.937 8.926,36.104 11.364,38.542 R3.1 R6.2 ; v1(40.894,17.145) v1(40.894,27.305) ; v1(48.514,27.305) IC3.11
  Bottom Layer w0.508: v1(8.89,32.004) 31.369,9.525 37.973,9.525 38.354,9.906 38.354,14.605 v1(40.894,17.145) ; v1(40.894,27.305) v1(48.514,27.305)
NetEncoder_A1: Encoder.A1 K14.3 | length 7.1
  Top Layer w0.508: K14.3@120.904,31.376 121.123,31.158 121.123,30.621 Encoder.A1
NetEncoder_B1: Encoder.B1 K14.2 | length 6.2
  Top Layer w0.508: K14.2@118.364,31.471 118.364,28.38 Encoder.B1
NetEncoder_C1: Encoder.C1 Encoder.MH1 K14.4 | length 21
  Bottom Layer w0.508: K14.4@123.444,31.471 123.444,26.806 123.075,26.437 123.075,14.169 Encoder.MH1
NetEncoder_MH2: Encoder.MH2 K14.1 | length 21.5
  Top Layer w0.508: K14.1 115.824,26.762 120.575,22.011 Encoder.MH2
NetIC2_1: IC2.1 R1.1 R5.2 | length 33.3
  Top Layer w0.508: R1.1 26.604,84.611 26.162,84.169 26.162,77.216 26.587,76.791 29.211,76.791 29.509,77.088 29.509,78.089 R5.2 ; v1(28.194,86.36) 28.194,83.22 29.718,81.696 R5.2@29.718,78.298
  Bottom Layer w0.508: v1(28.194,86.36) 28.194,87.63 32.639,92.075 IC2.1
NetIC2_2: IC2.2 R1.2 R8.2 | length 29.8
  Top Layer w0.508: v1(24.638,82.296) 24.638,84.77 R1.2 24.704,88.045 R8.2@27.239,90.58
  Bottom Layer w0.508: v1(24.638,82.296) 36.83,82.296 38.1,83.566 38.1,88.424 IC2.2
NetIC2_6: IC2.6 R12.1 R15.2 | length 17
  Top Layer w0.508: v1(51.816,89.662) 53.111,90.957 53.111,91.907 R12.1@53.272,92.068 ; R12.1 53.279,92.903 55.179,94.803 R15.2
  Bottom Layer w0.508: IC2.6 49.149,86.995 v1(51.816,89.662)
NetIC2_7: IC2.7 R11.2 R14.1 | length 23.9
  Top Layer w0.508: IC2.7 41.529,86.265 41.529,83.82 43.434,81.915 R11.2 48.102,81.819 48.102,79.852 v1(48.006,79.756) ; v1(52.07,79.502) 53.279,80.711 R14.1
  Bottom Layer w0.508: v1(48.006,79.756) 48.133,79.629 51.943,79.629 v1(52.07,79.502)
NetIC3_1: IC3.1 R19.1 | length 33.1
  Top Layer w0.508: v1(74.93,72.644) 74.93,72.866 80.579,78.515 R19.1
  Bottom Layer w0.508: IC3.1 71.247,60.388 71.247,68.961 v1(74.93,72.644)
NetIC3_2: IC3.2 K7.2 R16.1 | length 25.4
  Top Layer w0.508: R16.1@52.644,44.86 51.054,43.27 51.054,37.465 K7.2 ; R16.1 52.644,46.294 56.515,50.165 IC3.2
NetIC3_7: IC3.7 K5.1 | length 16.8
  Bottom Layer w0.508: K5.1 53.594,27.495 IC3.7
NetIC3_8: IC3.8 K5.2 | length 16.8
  Bottom Layer w0.508: K5.2 58.63,27.261 58.63,29.991 IC3.8
NetIC3_12: IC3.12 K9.1 | length 14.3
  Bottom Layer w0.508: K9.1 54.165,15.176 54.165,15.366 IC3.12
NetIC3_13: IC3.13 K9.2 | length 14.3
  Bottom Layer w0.508: K9.2 53.594,12.255 IC3.13
NetIC3_14: IC3.14 K9.3 | length 14.3
  Bottom Layer w0.508: K9.3 53.594,9.715 IC3.14
NetIC3_15: IC3.15 K9.4 | length 14.3
  Bottom Layer w0.508: K9.4 53.594,7.175 IC3.15
NetIC3_16: IC3.16 K9.5 | length 14.3
  Bottom Layer w0.508: K9.5 53.594,4.635 IC3.16
NetIC3_19: IC3.19 R7.1 | length 93.5
  Top Layer w0.508: R7.1 43.434,72.136 46.736,75.438 51.181,75.438 53.594,73.025 v1(53.594,62.865)
  Bottom Layer w0.508: v1(53.594,62.865) 53.594,52.07 62.23,43.434 62.23,41.91 62.738,41.402 64.262,41.402 66.802,38.862 66.802,10.223 IC3.19
NetIC3_20: IC3.20 K4.1 | length 26.5
  Bottom Layer w0.508: IC3.20 64.707,3.302 88.011,3.302 K4.1
NetIC3_21: IC3.21 K4.2 | length 11.2
  Bottom Layer w0.508: IC3.21 81.534,6.985 K4.2
NetIC3_22: IC3.22 K4.3 | length 11.2
  Bottom Layer w0.508: IC3.22 81.534,9.525 K4.3
NetIC3_23: IC3.23 K6.2 | length 14.4
  Bottom Layer w0.508: IC3.23 K6.2
NetIC3_24: IC3.24 K6.3 | length 14.4
  Bottom Layer w0.508: IC3.24 K6.3
NetIC3_27: IC3.27 K11.1 | length 18
  Bottom Layer w0.508: IC3.27 K11.1
NetIC3_28: IC3.28 K11.4 | length 16.9
  Top Layer w0.508: IC3.28 84.029,27.26 84.029,29.8 K11.4
NetIC3_30: IC3.30 K11.5 | length 16.9
  Top Layer w0.508: IC3.30 87.897,36.208 90.437,36.208 K11.5
NetIC3_33: IC3.33 K10.1 | length 21.5
  Bottom Layer w0.508: IC3.33 82.131,38.062 82.131,40.475 87.884,46.228 ; 88.061,46.342 89.776,46.342 90.678,47.244 90.678,48.641 K10.1
NetIC3_34: IC3.34 K10.2 | length 15
  Bottom Layer w0.508: IC3.34 79.111,37.582 79.111,38.674 87.994,47.557 89.086,47.557 K10.2
NetIC3_35: IC3.35 K13.2 R22.1 | length 50.1
  Top Layer w0.508: v1(74.549,45.085) 74.549,60.288 79.568,65.307 R22.1 ; IC3.35 92.329,40.005 96.139,36.195 K13.2
  Bottom Layer w0.508: v1(74.549,45.085) 74.695,44.939 74.695,44.304 IC3.35
NetIC3_36: IC3.36 K13.1 R21.1 | length 45.5
  Top Layer w0.508: v1(74.549,63.5) 74.549,65.09 R21.1 ; IC3.36 80.772,40.767 80.899,40.767 96.012,40.767 K13.1
  Bottom Layer w0.508: v1(74.549,63.5) 74.549,46.99 IC3.36
NetIC4_1: IC4.1 K15.4 | length 27
  Top Layer w0.508: v1(136.906,68.072) 137.029,67.949 137.029,65.798 IC4.1
  Bottom Layer w0.508: v1(136.906,68.072) 144.526,68.072 149.606,73.152 149.606,77.978 K15.4
NetIC4_2: IC4.2 LD1.11 | length 22.2
  Top Layer w0.508: LD1.11 128.524,72.263 128.524,67.056 129.273,66.307 133.337,66.307 135.763,63.881 138.005,63.881 138.303,64.179 IC4.2
NetIC4_3: IC4.3 LD1.7 | length 11.5
  Top Layer w0.508: LD1.7 131.652,65.024 133.684,62.992 139.192,62.992 139.573,63.373 IC4.3
NetIC4_4: IC4.4 LD1.4 | length 31.6
  Top Layer w0.508: LD1.4 123.317,62.23 139.7,62.23 140.843,63.373 IC4.4
NetIC4_5: IC4.5 LD1.2 | length 44.6
  Top Layer w0.508: LD1.2 113.538,73.279 113.538,64.324 116.394,61.468 140.208,61.468 142.113,63.373 IC4.5
NetIC4_6: IC4.6 LD1.1 | length 50.2
  Top Layer w0.508: LD1.1 112.776,75.057 112.776,64.008 116.078,60.706 140.524,60.706 143.383,63.565 IC4.6
NetIC4_7: IC4.7 LD1.10 | length 27
  Top Layer w0.508: v1(144.526,63.5) 144.653,63.627 IC4.7
  Bottom Layer w0.508: LD1.10 129.286,70.485 129.286,64.516 130.302,63.5 v1(144.526,63.5)
NetIC4_8: IC4.8 LD1.5 | length 40.6
  Top Layer w0.508: IC4.8 145.927,65.79 145.927,62.404 v1(146.05,62.281)
  Bottom Layer w0.508: LD1.5 113.792,65.913 113.792,64.262 115.773,62.281 v1(146.05,62.281)
NetIC4_9: IC4.9 LD1.3 | length 50.2
  Top Layer w0.508: IC4.9 147.197,65.79 147.197,61.083 v1(147.32,60.96)
  Bottom Layer w0.508: LD1.3 113.03,70.231 113.03,63.754 115.824,60.96 v1(147.32,60.96)
NetIC4_12: IC4.12 LD1.6 | length 40.9
  Top Layer w0.508: v1(146.812,78.994) 147.193,78.613 IC4.12
  Bottom Layer w0.508: LD1.6 129.521,79.102 v1@146.812,79.102
NetIC4_13: IC4.13 LD1.8 | length 19
  Top Layer w0.508: v1(145.034,72.39) 145.923,73.279 IC4.13
  Bottom Layer w0.508: LD1.8 136.271,72.39 v1(145.034,72.39)
NetIC4_14: IC4.14 LD1.9 | length 16.2
  Top Layer w0.508: LD1.9 140.716,70.104 144.653,74.041 IC4.14
NetIC4_15: IC4.15 LD1.12 | length 14.2
  Top Layer w0.508: v1(143.256,77.724) 143.383,77.597 IC4.15
  Bottom Layer w0.508: LD1.12 v1(143.256,77.724)
NetIC4_16: IC4.16 K15.3 | length 6.7
  Top Layer w0.508: IC4.16 142.113,80.137 K15.3
NetIC4_17: IC4.17 K15.2 | length 5.4
  Top Layer w0.508: IC4.17@140.847,76.176 140.847,81.411 K15.2
NetIC4_18: IC4.18 K15.1 | length 6.8
  Top Layer w0.508: K15.1@138.176,81.534 K15.1 139.001,80.963 139.001,80.709 139.573,80.137 IC4.18
NetK2_1: K2.1 RE1.12 RE1.24 | length 36
  Top Layer w0.508: K2.1 10.414,22.225 10.414,25.146 12.593,27.325 RE1.12
  Bottom Layer w0.508: RE1.12 29.464,31.015 29.464,33.595 RE1.24
NetK3_2: K3.2 R2.1 R4.2 R9.2 R13.2 | length 77.3
  Top Layer w0.508: K3.2 12.954,80.264 17.272,75.946 30.839,75.946 31.049,76.156 31.242,76.349 31.242,80.645 ; R4.2 25.441,97.257 25.441,98.339 25.908,98.806 29.083,98.806 29.777,98.112 R9.2@29.777,97.162 ; R2.1@29.784,84.23 29.784,83.246 31.242,81.788 31.242,80.645 ; R2.1 29.784,86.68 v1(30.099,86.995) ; R9.2 29.784,95.946 34.925,90.805 v1(35.179,90.805) ; v1@43.434,80.645 31.242,80.645 ; v1(43.434,85.725) 45.132,85.725 46.402,86.995 R13.2
  Bottom Layer w0.508: v1(30.099,86.995) 32.639,86.995 35.179,89.535 v1(35.179,90.805) ; v1@43.476,80.77 v1@43.476,85.683
  other v1: 43.517,80.728
NetK8_1: K8.1 L2.2 | length 11.1
  Top Layer w1.27: K8.1 76.454,91.44 L2.2
NetK8_2: K8.2 L2.3 | length 16.2
  Top Layer w1.27: K8.2 69.469,87.63 L2.3
NetL2_1: L2.1 T3.3 | length 22.3
  Top Layer w1.27: L2.1 82.976,95.25 84.5,96.774 93.744,96.774 94.488,96.03 94.488,90.424 92.964,88.9 T3.3
NetR7_2: R7.2 R10.2 T1.2 | length 47
  Top Layer w0.508: v1(19.939,43.18) 21.41,44.651 21.41,44.966 R10.2 ; R10.2@21.59,45.212 21.59,66.04 27.686,72.136 R7.2
  Bottom Layer w0.508: T1.2 16.994,40.235 v1(19.939,43.18)
NetR11_1: R11.1 R12.2 | length 12.3
  Top Layer w0.508: R11.1 50.267,82.083 50.267,84.557 51.562,85.852 51.562,87.463 55.179,91.08 R12.2
NetR17_1: R17.1 T2.2 T4.1 T5.2 | length 45.9
  Top Layer w0.508: T2.2 95.099,67.11 95.099,59.653 R17.1
  Bottom Layer w0.508: T4.1 64.716,77.47 T5.2 87.914,72.614 93.218,67.31 T2.2
NetR18_1: R18.1 T2.3 T5.3 | length 22.3
  Top Layer w0.508: R18.1 82.199,71.755 T5.3
  Bottom Layer w0.508: T5.3@86.614,76.08 86.614,72.644 93.144,66.114 93.495,66.114 T2.3
NetR18_2: R18.2 T3.1 | length 29.7
  Top Layer w1.27: R18.2 77.409,72.71 v1(83.439,78.74)
  Bottom Layer w1.27: v1(83.439,78.74) 85.344,80.645 85.344,91.44 87.884,93.98 T3.1
NetR19_2: R19.2 R20.2 T4.2 | length 17.8
  Top Layer w0.508: T4.2 R20.2@71.186,79.224 ; R20.2 71.225,79.209 71.225,77.917 71.522,77.619 77.873,77.619 78.433,78.179 78.433,78.494 R19.2
VIN: B1.1 C1.1 R3.2 R17.2 T2.1 T3.2 | length 261.9
  Top Layer w1.27: v1(9.398,40.132) R3.2@9.398,45.146 ; R3.2 9.464,58.74 C1.1 ; v1(17.399,29.845) v1(31.369,29.845) ; T3.2 90.962,91.343 88.628,91.343 87.884,90.599 87.884,83.004 93.599,77.289 T2.1 94.307,68.61 94.345,68.648 96.434,68.648 97.216,67.866 R17.2
  Bottom Layer w1.27: v1(9.398,40.132) 9.398,37.846 v1(17.399,29.845) ; C1.1 13.347,62.853 12.585,62.853 10.414,65.024 10.414,98.951 11.158,99.695 93.599,99.695 96.139,97.155 96.139,71.15 T2.1 ; v1(31.369,29.845) 35.814,29.845 B1.1
pads on no net: Encoder.MH3 Encoder.MH4 IC3.3 IC3.4 IC3.25 IC3.26 IC3.40 IC4.10 IC4.11 IC4.19 IC4.20 RE1.14
copper on no net:
  other v2: 3.81,2.54 104.14,2.54 116.84,6.35 129.032,30.734 142.24,53.34 142.24,91.44 3.81,99.06 104.14,99.06

## Polygon pours and split planes (outlines as drawn)
GND on Bottom Layer "GND_BOTTOM_3" (solid, pour order 9): 113.03,35.56 133.35,35.56 133.35,3.81 113.03,3.81
GND on Bottom Layer "GND_BOTTOM_2" (solid, pour order 3): 151.13,83.82 111.76,83.82 111.76,59.69 151.13,59.69
GND on Bottom Layer "GND_BOTTOM_1" (solid, pour order 0): 5.08,101.6 5.08,1.27 107.95,1.27 107.95,101.6
GND on Top Layer "GND_TOP_3" (solid, pour order 8): 113.03,35.56 113.03,3.81 133.35,3.81 133.35,35.56
GND on Top Layer "GND_TOP_2" (solid, pour order 4): 111.76,83.82 151.13,83.82 151.13,59.69 111.76,59.69
GND on Top Layer "GND_TOP_1" (solid, pour order 1): 5.08,101.6 5.08,1.27 107.95,1.27 107.95,101.6

## Silkscreen, mask and mechanical layers (free items; w line width, h text height)
Top Overlay:
  lines w0.254: 109.22,2.54 109.22,101.6 ; 111.76,40.64 149.86,40.64 ; 137.16,2.54 137.16,38.1
  text "2021-2022" at 2.794,81.026 h1.52 r270
  text "Soldeerbout" at 102.616,70.104 h1.52 r90
  text "P-A H." at 137.922,57.15 h1.52
  text "Philippe-Arnaud Hiroux" at 3.302,48.006 h1.52 r270
  text "P-A H." at 121.666,4.318 h1.52